# Altium PCB PCB_Диплом_2026-01-28.pcbdoc
Units mm, origin at the board's own origin, x right, y up, seen from the top; angles counter-clockwise.
Board outline 96.27 x 75.18 mm, 2 copper layers (Top Layer, Bottom Layer); 38 components, 21 nets, 89 pads, 0 vias.
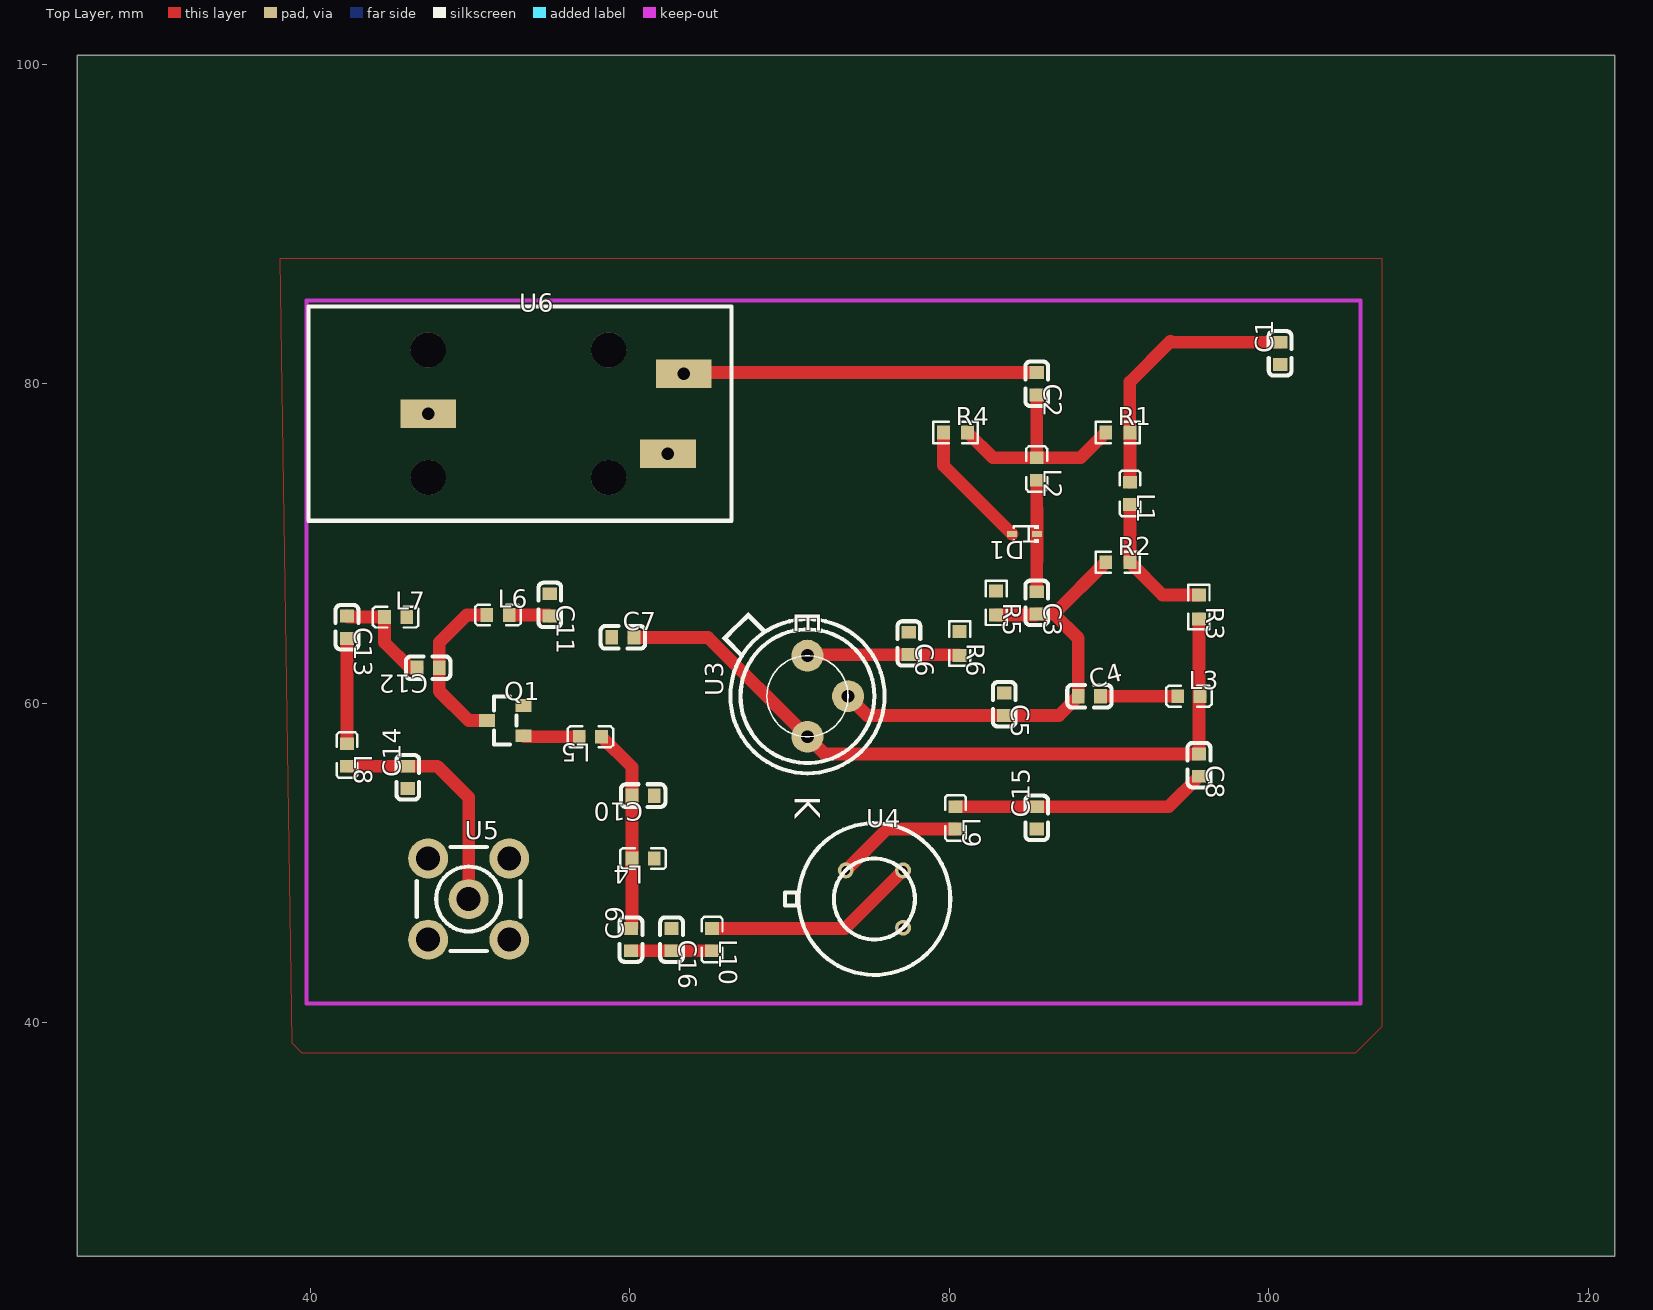
[diagram p0: Top Layer view]
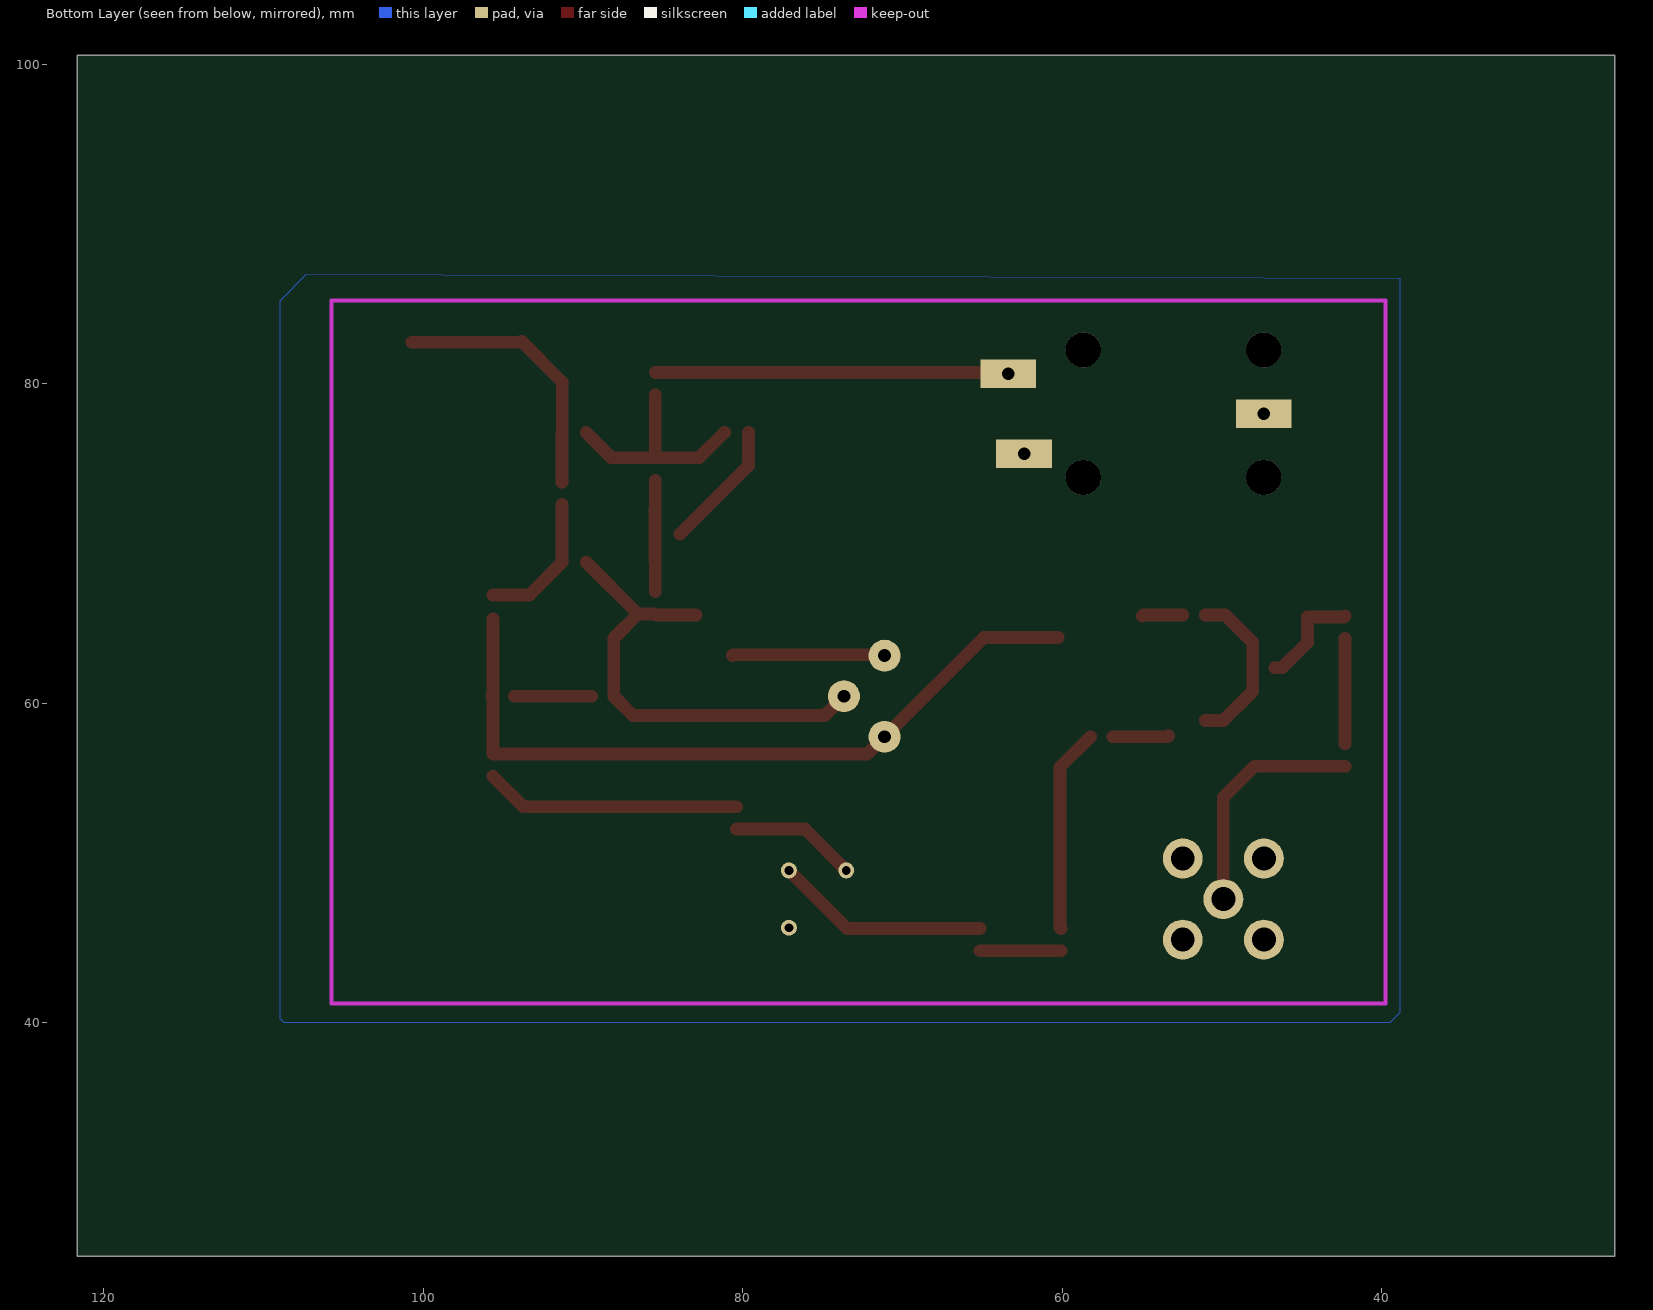
[diagram p1: Bottom Layer view, seen from below]

## Layer stack, top to bottom
Top Layer: signal copper (thickness not stored)
Dielectric: dielectric 0.32, FR-4, Dk 4.8
Bottom Layer: signal copper (thickness not stored)

## Board outline
121.666,25.4 25.4,25.4 25.4,100.584 121.666,100.584

## Components (designator, comment, footprint, x,y, rotation, side; value= is the part's Value field where it differs from the comment)
C1 "0.1u" C0603 100.711,81.915 r90 top
C2 "0.1u" C0603 85.471,80.01 r270 top
C3 "2.23pF" C0603 85.471,66.294 r270 top
C4 "1.5pF" C0603 88.773,60.452 r0 top
C5 "24.36pF" C0603 83.439,59.944 r270 top
C6 "1.1pF" C0603 77.47,63.754 r270 top
C7 "23pF" C0603 59.563,64.135 r0 top
C8 "1.33pF" C0603 95.631,56.134 r270 top
C9 "0.1u" C0603 60.071,45.212 r90 top
C10 "0.1u" C0603 60.833,54.229 r180 top
C11 "0.1u" C0603 54.991,66.167 r270 top
C12 "0.1u" C0603 47.371,62.23 r180 top
C13 "0.1u" C0603 42.291,64.77 r270 top
C14 "0.1u" C0603 46.101,55.372 r90 top
C15 "10pF" C0603 85.471,52.832 r90 top
C16 "10pF" C0603 62.611,45.212 r270 top
D1 "КВ117А" SC-79_L1.2-W0.8-LS1.6-RD 84.709,70.612 r180 top
L1 "1m" L0603 91.313,73.152 r270 top
L2 "1m" L0603 85.471,74.676 r270 top
L3 "100nH" L0603 94.996,60.452 r0 top
L4 "1m" L0603 60.833,50.292 r180 top
L5 "1m" L0603 57.531,57.912 r180 top
L6 "1m" L0603 51.747,65.532 r0 top
L7 "1m" L0603 45.339,65.405 r0 top
L8 "1m" L0603 42.291,56.769 r270 top
L9 "43nH" L0603 80.391,52.832 r270 top
L10 "43nH" L0603 65.151,45.212 r270 top
Q1 "BFR92PE6327HTSA1" SOT-23_L2.9-W1.3-P1.90-LS2.4-BR 52.197,58.928 r0 top
R1 "15.4k" R0603 90.551,76.962 r0 top
R2 "33k" R0603 90.551,68.834 r0 top
R3 "1k" R0603 95.631,66.04 r270 top
R4 "8.6k" R0603 80.391,76.962 r0 top
R5 "22k" R0603 82.931,66.294 r270 top
R6 "331 Ohm" R0603 80.645,63.754 r270 top
U3 "KT325B" KT325B 71.12,60.452 r90 top
U4 "HDF434M(TO39)" HDF434M(TO39) 75.311,47.752 r0 top
U5 "SMA-KE_C9900010995" ANT-TH_KH-SMA 49.911,47.752 r0 top
U6 "ST-008S-05" ST-008S-05 39.878,84.836 r0 top

## Footprints (in the part's own frame and the unit in brackets; to place one, negate y for a bottom-side part, rotate by r counter-clockwise, add the part's x,y. Pads: shape width x height; smd on the part's side, far side on the other; paste and mask are expansions set on the pad)
ANT-TH_KH-SMA [mm]
  round 2.5 hole 1.5 paste+0 mask+0.051: 1(-2.54,-2.54) 2(-2.54,2.54) 3(2.54,2.54) 4(2.54,-2.54) 5(0,0)
  silkscreen extent -3.25,-3.25 3.25,3.25
C0603 [mm]
  rect 0.8x0.9 smd paste+0 mask+0.051: 1(-0.7,0) 2(0.7,0)
  silkscreen extent -1.39,-0.71 1.39,0.71
HDF434M(TO39) [mm]
  round 1 hole 0.55 paste+0 mask+0.051: 1(-1.796,1.796) 2(1.796,1.796) 3(1.796,-1.796) 3(1.796,-1.796) 4(1.796,-1.796)
  silkscreen extent -5.59,-4.75 4.75,4.75
KT325B [mm]
  round 2 hole 0.8 paste+0 mask+0.051: 1(0,-2.54) 2(2.54,0) 3(-2.54,0)
  silkscreen extent -4.83,-4.83 5.27,5.36
L0603 [mm]
  rect 0.8x0.864 smd paste-100 mask+0.051: 1(-0.7,0) 2(0.7,0)
  silkscreen extent -1.42,-0.65 1.42,0.65
R0603 [mm]
  rect 0.806x0.864 smd paste-100 mask+0.051: 1(-0.753,0) 2(0.753,0)
  silkscreen extent -1.39,-0.66 1.39,0.66
SC-79_L1.2-W0.8-LS1.6-RD [mm]
  rect 0.63x0.36 smd paste+0 mask+0.051: 1(-0.785,0) 2(0.785,0)
  silkscreen extent -0.9,-0.55 0.68,0.55
SOT-23_L2.9-W1.3-P1.90-LS2.4-BR [mm]
  rect 1x0.8 smd paste+0 mask+0.051: 1(1.15,-0.95) 2(1.15,0.95) 3(-1.15,0)
  silkscreen extent -0.7,-1.5 0.7,1.5
ST-008S-05 [mm]
  rect 3.5x1.8 hole 0.8 paste+0 mask+0.051: 2(7.5,-6.7) 3(22.5,-9.2) 4(23.5,-4.2)
  round 2.2 hole 2.2 unplated paste+0: ""(7.5,-10.7) ""(7.5,-2.7) ""(18.8,-10.7) ""(18.8,-2.7)
  silkscreen extent 0,-13.4 26.5,0

## Nets (pads, with @x,y where several pads share a name; then routed paths per layer and width w, separated by ;. In a path a pad name is that pad's centre, name@x,y a point inside that pad or via, vN(x,y) a via of type N, cw(c..) or ccw(c..) an arc to the next point about the centre after c; other vN are vias at no path point)
AMP: C9.1 C16.2 L10.2 | length 5.1
  Top Layer w0.8: C9.1 C16.2 L10.2
ANT: C14.2 L8.2 U5.5 | length 14.8
  Top Layer w0.8: L8.2 C14.2 47.94,56.073 49.911,54.102 U5.5
C3_2: C3.2 C4.1 C5.2 R2.1 R5.2 U3.1 | length 29.4
  Top Layer w0.8: U3.1 74.868,59.244 C5.2 86.865,59.244 C4.1 88.073,64.079 86.558,65.594 ; R5.2 85.418,65.541 C3.2 86.558,65.594 ; R2.1 86.558,65.594
C9_2: C9.2 C10.2 L4.2 L5.1 | length 12.8
  Top Layer w0.8: L5.1 60.133,56.01 C10.2 L4.2 60.133,45.974 C9.2
C12_2: C12.2 C13.1 L7.1 | length 6.7
  Top Layer w0.8: C13.1 42.356,65.405 L7.1 ; L7.1 44.638,63.82 46.228,62.23 C12.2
C13_2: C13.2 L8.1 | length 6.6
  Top Layer w0.8: L8.1 C13.2
GND: C1.1 C5.1 C6.1 C7.1 C10.1 C11.1 C14.1 C15.1 C16.1 D1.2 L4.1 L7.2 Q1.2 R4.1 R5.1 R6.1 U4.3 U4.4 U5.1 U5.2 U5.3 U5.4 U6.2 | length 8.1
  Top Layer w0.8: R4.1 79.638,74.898 D1.2
L1_2: L1.2 R2.2 R3.1 | length 8.8
  Top Layer w0.8: R2.2 93.345,66.793 R3.1 ; R2.2 L1.2
L2_2: C3.1 D1.1 L2.2 | length 7
  Top Layer w0.8: C3.1 D1.1 L2.2
L3_1: C4.2 L3.1 | length 4.8
  Top Layer w0.8: C4.2 L3.1
L5_2: L5.2 Q1.1 | length 3.5
  Top Layer w0.8: Q1.1 53.413,57.912 L5.2
L6_2: C11.2 L6.2 | length 2.6
  Top Layer w0.8: L6.2 54.926,65.532 C11.2
L9_2: L9.2 U4.1 | length 7.9
  Top Layer w0.8: U4.1 76.099,52.132 L9.2
L10_1: L10.1 U4.2 | length 13.5
  Top Layer w0.8: L10.1 73.471,45.912 U4.2
LF_IN: C2.1 U6.4 | length 22.1
  Top Layer w0.8: U6.4@63.373,80.645 63.447,80.719 C2.1@85.466,80.719
Q1_3: C12.1 L6.1 Q1.3 | length 10.5
  Top Layer w0.8: Q1.3 49.911,58.928 48.072,60.767 C12.1 48.072,63.82 49.784,65.532 L6.1
R1_1: C2.2 L2.1 R1.1 R4.2 | length 13.9
  Top Layer w0.8: R4.2 82.73,75.376 L2.1 ; C2.2 L2.1 ; R1.1 88.212,75.376 L2.1
R3_2: C7.2 C8.1 L3.2 R3.2 U3.3 | length 46.9
  Top Layer w0.8: C7.2 64.897,64.135 U3.3 72.198,56.834 C8.1 95.631,60.387 L3.2 95.631,60.517 R3.2
SAW: C8.2 C15.2 L9.1 | length 16
  Top Layer w0.8: L9.1 C15.2 93.729,53.532 C8.2
U3_2: C6.2 R6.2 U3.2 | length 9.6
  Top Layer w0.8: U3.2 71.182,63.054 C6.2 80.592,63.054 R6.2
VCC: C1.2 L1.1 R1.2 | length 16.8
  Top Layer w0.8: R1.2 91.304,80.128 93.853,82.677 93.915,82.615 C1.2 ; R1.2 L1.1
pads on no net: U6. U6.3

## Polygon pours and split planes (outlines as drawn)
GND on Top Layer (solid): 38.1,87.884 107.061,87.884 107.061,39.751 105.41,38.1 39.497,38.1 38.862,38.735
GND on Bottom Layer (solid): 38.862,86.614 38.862,40.64 39.497,40.005 108.712,40.005 108.966,40.259 108.966,85.217 107.315,86.868

## Text inside footprints (layer, text, board x,y; h text height)
U3: Top Overlay "E" at 70.32,65.786 h1.6 r270; Top Overlay "K" at 70.32,54.229 h1.6 r270